# Altium PCB project_vodorezov_switch.PcbDoc (part 2 of 2)
Units mm, origin at the board's own origin, x right, y up, seen from the top; angles counter-clockwise.
Board outline 100 x 50 mm, 6 copper layers (Top Layer, Signal Layer 1, Signal Layer 2, Signal Layer 3, Signal Layer 4, Bottom Layer), stack 1.503 mm thick; 130 components, 96 nets, 660 pads, 0 vias.
Unrouted connection lines stored in the file: 415.
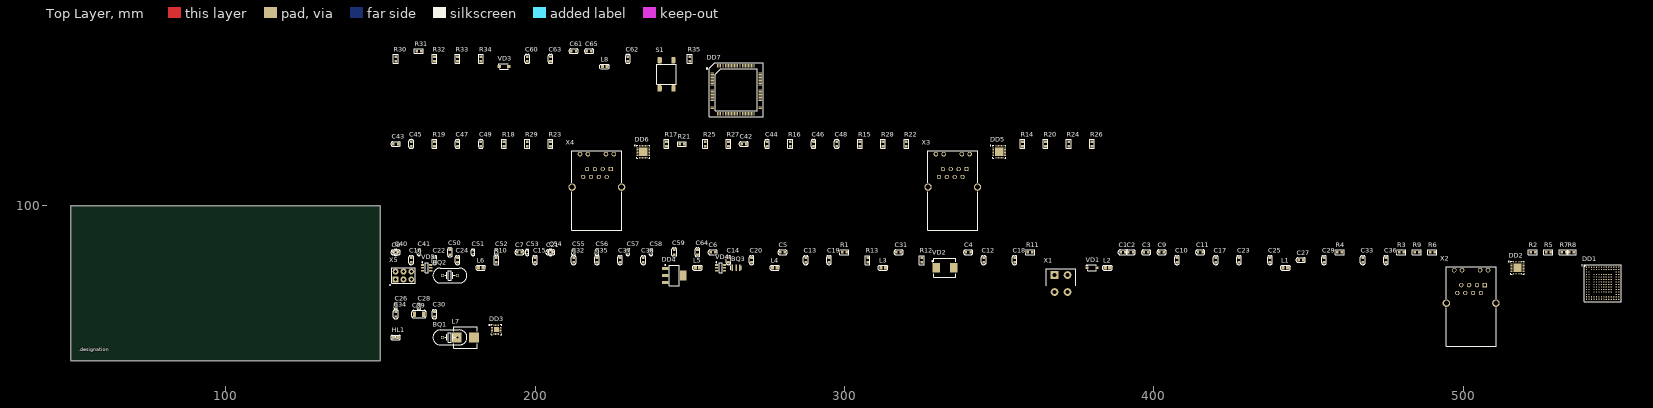
[diagram p0: Top Layer view]

## Part data (continued)
VD3: library part vd0002, "=????????", HelpURL=https://www.onsemi.com/products/discretes-drivers/diodes-rectifiers/schottky-diodes-schottky-rectifiers/mbr140sf, ID=vd0002, ??????=SOD-123FL, ???????????? ???????? ??????????="40 ?", ???????????? ?????? ??????????="0,88 ?", ???????????? ?????? ???="1 ?", ????????????=MBR140SFT1G, ????????="???? ?????? 40 ? 1 ?", ?????????????="ON Semiconductor", ??????? ???????????="?? –55 °? ?? +125 °?", ???????=???????
VD4 VD5: library part vd0016, "=????????", HelpURL=https://www.ti.com/product/TPD2S017, ID=vd0016, ??????=SOT-23-6, ????????????=TPD2S017DBVR, ????????="??????? ?????? ??? ?????????? ????? 5 ?", ?????????????="Texas Instruments Inc.", ???????=???????
X1: library part x0006, "=????????", Contact_1=+12V, Contact_2=+12V, Contact_3=GND, Contact_4=GND, HelpURL=https://www.te.com/usa-en/product-4-1775099-0.html, ID=x0006, ????????????=4-1775099-0, ????????="ATX Power 4 pin ?????? ??????", ?????????????="TE Connectivity", ???????=????????
X2 X3 X4: library part x0015, "=????????", Contact_1=TD+, Contact_2=TCT, Contact_3=TD-, Contact_4=RD+, Contact_5=RCT, Contact_6=RD-, Contact_7=LED1+, Contact_8=LED1-, Contact_9=LED2-, Contact_10=LED2+, Contact_11="CHS GND", Contact_12=SHIELD, HelpURL=https://www.te.com/usa-en/product-5-2301994-8.html, ID=x0015, TP1=SHIELD, ????????????=5-2301994-8, ????????="RJ45 ??????????????? ????????????? 10/100 Mbps LED ?????? ???????", ?????????????="TE Connectivity", ???????=????????
X5: library part x0031, "=????????", Contact_1=VDD, Contact_2=SWCLK, Contact_3=GND, Contact_4=SWDIO, Contact_5=nRST, Contact_6=SWO, HelpURL=http://en.connfly.group/product/xVkr=EusQssAN0gN=Aos=mU+UrVkR9kqEAN0gN9g+WqANB+A, ID=x0031, ????????????=DS1021-2x3SF11-B, ????????="PLD 6 pin 2,54 ?? ????? ??????", ?????????????="Connfly Electronic Co., Ltd.", ???????=???????

## Nets (pads, with @x,y where several pads share a name; then routed paths per layer and width w, separated by ;. In a path a pad name is that pad's centre, name@x,y a point inside that pad or via, vN(x,y) a via of type N, cw(c..) or ccw(c..) an arc to the next point about the centre after c; other vN are vias at no path point)
+1.2V: C1.1 C4.1 C7.1 C37.1 C38.1 DD4.3 L1.1 L2.1 L5.1 R10.2
+3.3V: BQ2.2 C5.1 C6.1 C8.1 C32.1 C33.1 C35.1 C36.1 C39.1 C41.1 C46.1 C47.1 C48.1 C49.1 C50.1 C51.1 C52.1 C53.1 C54.1 C55.1 C56.1 C57.1 C58.1 DD2.1 DD2.5 DD2.9 DD2.19 DD3.5 DD3.14 DD4.1 DD5.1 DD5.5 DD5.9 DD5.19 DD6.1 DD6.5 DD6.9 DD6.19 DD7.6 DD7.11 DD7.19 DD7.28 DD7.50 DD7.75 DD7.100 L3.1 L4.1 L6.1 L7.2 L8.2 R2.2 R5.2 R7.2 R8.2 R11.2 R12.1 R14.2 R17.2 R20.2 R21.2 R24.2 R25.2 R26.2 R27.2 R35.2 VD3.2 VD4.5 VD5.5 X2.2 X2.5 X3.2 X3.5 X4.2 X4.5
CLK25_1: C26.1 DD1.K2
CLK25_2: BQ1.2 C28.1 DD1.H1
CLK50_1: BQ2.1 C40.1 DD2.4 DD5.4 DD6.4
CONN_nRST: R33.1 X5.5
CONN_SWCLK: R31.1 X5.2
CONN_SWDIO: R32.1 X5.4
CONN_SWO: R34.1 X5.6
GND: C4.2 C5.2 C6.2 C7.2 C8.2 C12.2 C13.2 C14.2 C15.2 C16.2 C18.2 C19.2 C20.2 C21.2 C22.2 C24.2 C26.2 C27.2 C28.2 C29.2 C30.2 C31.2 C32.2 C33.2 C34.2 C35.2 C36.2 C37.2 C38.2 C39.2 C40.2 C41.2 C42.2 C43.2 C44.2 C45.2 C46.2 C47.2 C48.2 C49.2 C50.2 C51.2 C52.2 C53.2 C54.2 C55.2 C56.2 C57.2 C58.2 C59.2 C60.2 C61.2 C62.2 C63.2 C64.2 C65.2 DD1.A1 DD1.A14 DD1.B13 DD1.E5 DD1.E6 DD1.E7 DD1.E8 DD1.E9 DD1.E10 DD1.F5 DD1.F6 DD1.F7 DD1.F8 DD1.F9 DD1.F10 DD1.G5 DD1.G6 DD1.G7 DD1.G8 DD1.G9 DD1.G10 DD1.H5 DD1.H6 DD1.H7 DD1.H8 DD1.H9 DD1.H10 DD1.J2 DD1.J5 DD1.J6 DD1.J7 DD1.J8 DD1.J9 DD1.J10 DD1.K4 DD1.K5 DD1.K6 DD1.K7 DD1.K8 DD1.K9 DD1.K10 DD1.L2 DD1.L7 DD1.N2 DD1.N13 DD1.P1 DD1.P14 DD2.25 DD3.6 DD3.7 DD3.8 DD3.15 DD3.16 DD4.2 DD5.25 DD6.25 DD7.10 DD7.20 DD7.27 DD7.74 DD7.94 DD7.99 R1.1 R4.1 R10.1 R13.2 R16.1 R19.1 R30.1 S1.2 VD2.1 VD4.2 VD5.2 X1.3 X1.4 X2.8 X2.9 X2.11 X2.12 X2.TP1 X3.8 X3.9 X3.11 X3.12 X3.TP1 X4.8 X4.9 X4.11 X4.12 X4.TP1 X5.3
MAC_VDD_CLO: C13.1 C19.1 DD1.H4 L3.2
MAC_VDD_CORE: C2.1 C3.1 C9.1 C10.1 C11.1 C17.1 C23.1 C25.1 DD1.D6 DD1.D9 DD1.F4 DD1.F11 DD1.J4 DD1.J11 DD1.L6 DD1.L9 L1.2
MAC_VDD_HOST: C14.1 C20.1 DD1.L5 L4.2
MAC_VDD_MII: C16.1 C22.1 C24.1 DD1.D4 DD1.D5 DD1.D7 DD1.D8 DD1.D10 DD1.D11 DD1.E4 DD1.E11 DD1.G4 DD1.G11 DD1.H11 DD1.K11 DD1.L8 DD1.L10 DD1.L11 L6.2
MAC_VDD_OSC: C15.1 C21.1 DD1.K1 L5.2
MAC_VDD_PLL: C12.1 C18.1 DD1.J1 L2.2
MCU_MAC_SPI_SCK: DD1.P5 DD7.52
MCU_MAC_SPI_SDI: DD1.N5 DD7.54
MCU_MAC_SPI_SDO: DD1.P4 DD7.53
MCU_MAC_SPI_SS_N: DD1.N6 DD7.51
MCU_nRST: C62.1 DD2.15 DD5.15 DD6.15 DD7.14 R35.1 S1.1 VD5.6
MCU_SWCLK: DD7.76 VD4.6
MCU_SWDIO: DD7.72 VD4.4
MCU_SWO: DD7.89 VD5.4
MII0_CRS_DV: DD1.G1 DD2.11
MII0_RXD0: DD1.E1 DD2.8
MII0_RXD1: DD1.F2 DD2.7
MII0_RXER: DD1.H2 DD2.10
MII0_TXD0: DD1.A2 DD2.17
MII0_TXD1: DD1.B1 DD2.18
MII0_TXEN: DD1.D2 DD2.16
MII1_CRS_DV: DD1.A4 DD5.11
MII1_RXD0: DD1.A6 DD5.8
MII1_RXD1: DD1.B5 DD5.7
MII1_RXER: DD1.B3 DD5.10
MII1_TXD0: DD1.B9 DD5.17
MII1_TXD1: DD1.A9 DD5.18
MII1_TXEN: DD1.B7 DD5.16
MII2_CRS_DV: DD1.A11 DD6.11
MII2_RXD0: DD1.A13 DD6.8
MII2_RXD1: DD1.B12 DD6.7
MII2_RXER: DD1.B10 DD6.10
MII2_TXD0: DD1.E13 DD6.17
MII2_TXD1: DD1.E14 DD6.18
MII2_TXEN: DD1.C13 DD6.16
NetBQ3_1: BQ3.1 DD7.12
NetBQ3_3: BQ3.3 DD7.13
NetC1_2: C1.2 C2.2 C3.2 C9.2 C10.2 C11.2 C17.2 C23.2 C25.2
NetC27_1: C27.1 C29.1 DD2.6
NetC34_1: C34.1 DD3.9
NetC42_1: C42.1 C44.1 DD5.6
NetC43_1: C43.1 C45.1 DD6.6
NetC59_1: C59.1 C61.1 C64.1 C65.1 DD7.21 DD7.22 L8.1
NetC60_1: C60.1 DD7.73
NetC63_1: C63.1 DD7.49
NetDD2_2: DD2.2 R6.1
NetDD2_3: DD2.3 R9.1
NetDD2_20: DD2.20 R2.1 X2.3
NetDD2_21: DD2.21 R5.1 X2.1
NetDD2_22: DD2.22 R7.1 X2.6
NetDD2_23: DD2.23 R8.1 X2.4
NetDD2_24: DD2.24 R3.2
NetDD3_0: DD3.0 R12.2 R13.1
NetDD3_1: DD3.1 DD3.2 DD3.3 L7.1
NetDD3_4: DD3.4 R11.1
NetDD5_2: DD5.2 R22.1
NetDD5_3: DD5.3 R28.1
NetDD5_20: DD5.20 R14.1 X3.3
NetDD5_21: DD5.21 R20.1 X3.1
NetDD5_22: DD5.22 R24.1 X3.6
NetDD5_23: DD5.23 R26.1 X3.4
NetDD5_24: DD5.24 R15.2
NetDD6_2: DD6.2 R23.1
NetDD6_3: DD6.3 R29.1
NetDD6_20: DD6.20 R17.1 X4.3
NetDD6_21: DD6.21 R21.1 X4.1
NetDD6_22: DD6.22 R25.1 X4.6
NetDD6_23: DD6.23 R27.1 X4.4
NetDD6_24: DD6.24 R18.2
NetHL1_1: HL1.1 VD1.2
NetHL1_2: HL1.2 R1.2
NetR3_1: R3.1 R4.2
NetR6_2: R6.2 X2.10
NetR9_2: R9.2 X2.7
NetR15_1: R15.1 R16.2
NetR18_1: R18.1 R19.2
NetR22_2: R22.2 X3.10
NetR23_2: R23.2 X4.10
NetR28_2: R28.2 X3.7
NetR29_2: R29.2 X4.7
NetR30_2: R30.2 VD3.1 X5.1
NetR31_2: R31.2 VD4.1
NetR32_2: R32.2 VD4.3
NetR33_2: R33.2 VD5.1
NetR34_2: R34.2 VD5.3
VIN: C30.1 C31.1 DD3.10 DD3.11 DD3.12 DD3.13 VD1.1 VD2.2 X1.1 X1.2
pads on no net: BQ1.1 BQ3.2 DD1.A3 DD1.A5 DD1.A7 DD1.A8 DD1.A10 DD1.A12 DD1.B4 DD1.B6 DD1.B8 DD1.B11 DD1.B14 DD1.C1 DD1.C2 DD1.C14 DD1.D1 DD1.D13 DD1.D14 DD1.E2 DD1.F1 DD1.F13 DD1.F14 DD1.G2 DD1.G13 DD1.G14 DD1.H13 DD1.H14 DD1.J13 DD1.J14 DD1.K13 DD1.K14 DD1.L1 DD1.L4 DD1.L13 DD1.L14 DD1.M1 DD1.M2 DD1.M13 DD1.M14 DD1.N1 DD1.N3 DD1.N4 DD1.N7 DD1.N8 DD1.N9 DD1.N10 DD1.N11 DD1.N12 DD1.N14 DD1.P2 DD1.P3 DD1.P6 DD1.P7 DD1.P8 DD1.P9 DD1.P10 DD1.P11 DD1.P12 DD1.P13 DD2.12 DD2.13 DD2.14 DD4.4 DD5.12 DD5.13 DD5.14 DD6.12 DD6.13 DD6.14 DD7.1 DD7.2 DD7.3 DD7.4 DD7.5 DD7.7 DD7.8 DD7.9 DD7.15 DD7.16 DD7.17 DD7.18 DD7.23 DD7.24 DD7.25 DD7.26 DD7.29 DD7.30 DD7.31 DD7.32 DD7.33 DD7.34 DD7.35 DD7.36 DD7.37 DD7.38 DD7.39 DD7.40 DD7.41 DD7.42 DD7.43 DD7.44 DD7.45 DD7.46 DD7.47 DD7.48 DD7.55 DD7.56 DD7.57 DD7.58 DD7.59 DD7.60 DD7.61 DD7.62 DD7.63 DD7.64 DD7.65 DD7.66 DD7.67 DD7.68 DD7.69 DD7.70 DD7.71 DD7.77 DD7.78 DD7.79 DD7.80 DD7.81 DD7.82 DD7.83 DD7.84 DD7.85 DD7.86 DD7.87 DD7.88 DD7.90 DD7.91 DD7.92 DD7.93 DD7.95 DD7.96 DD7.97 DD7.98 X2. X3. X4.

## Silkscreen, mask and mechanical layers (free items; w line width, h text height)
Top Overlay:
  text ".designation" at 52.5,52.5 h2
Bottom Overlay:
  text ".pcb_dec_number" at 68.5,52.5 h2
Board:
  the board outline again, w0.1
Assembly Notes (Mech5):
  text "'.title'" at 50,47.5 h2
  text "'.project'_'.pcb_dec_number'['.Pcb_File_Name_No_Path']" at 50,45 h2